# Altium PCB drivers_lvds.PcbDoc (part 2 of 2)
Units mil, origin at the board's own origin, x right, y up, seen from the top; angles counter-clockwise.
Board outline 2600 x 3200 mil, 2 copper layers (Top Layer, Bottom Layer); 42 components, 134 nets, 676 pads, 218 vias.
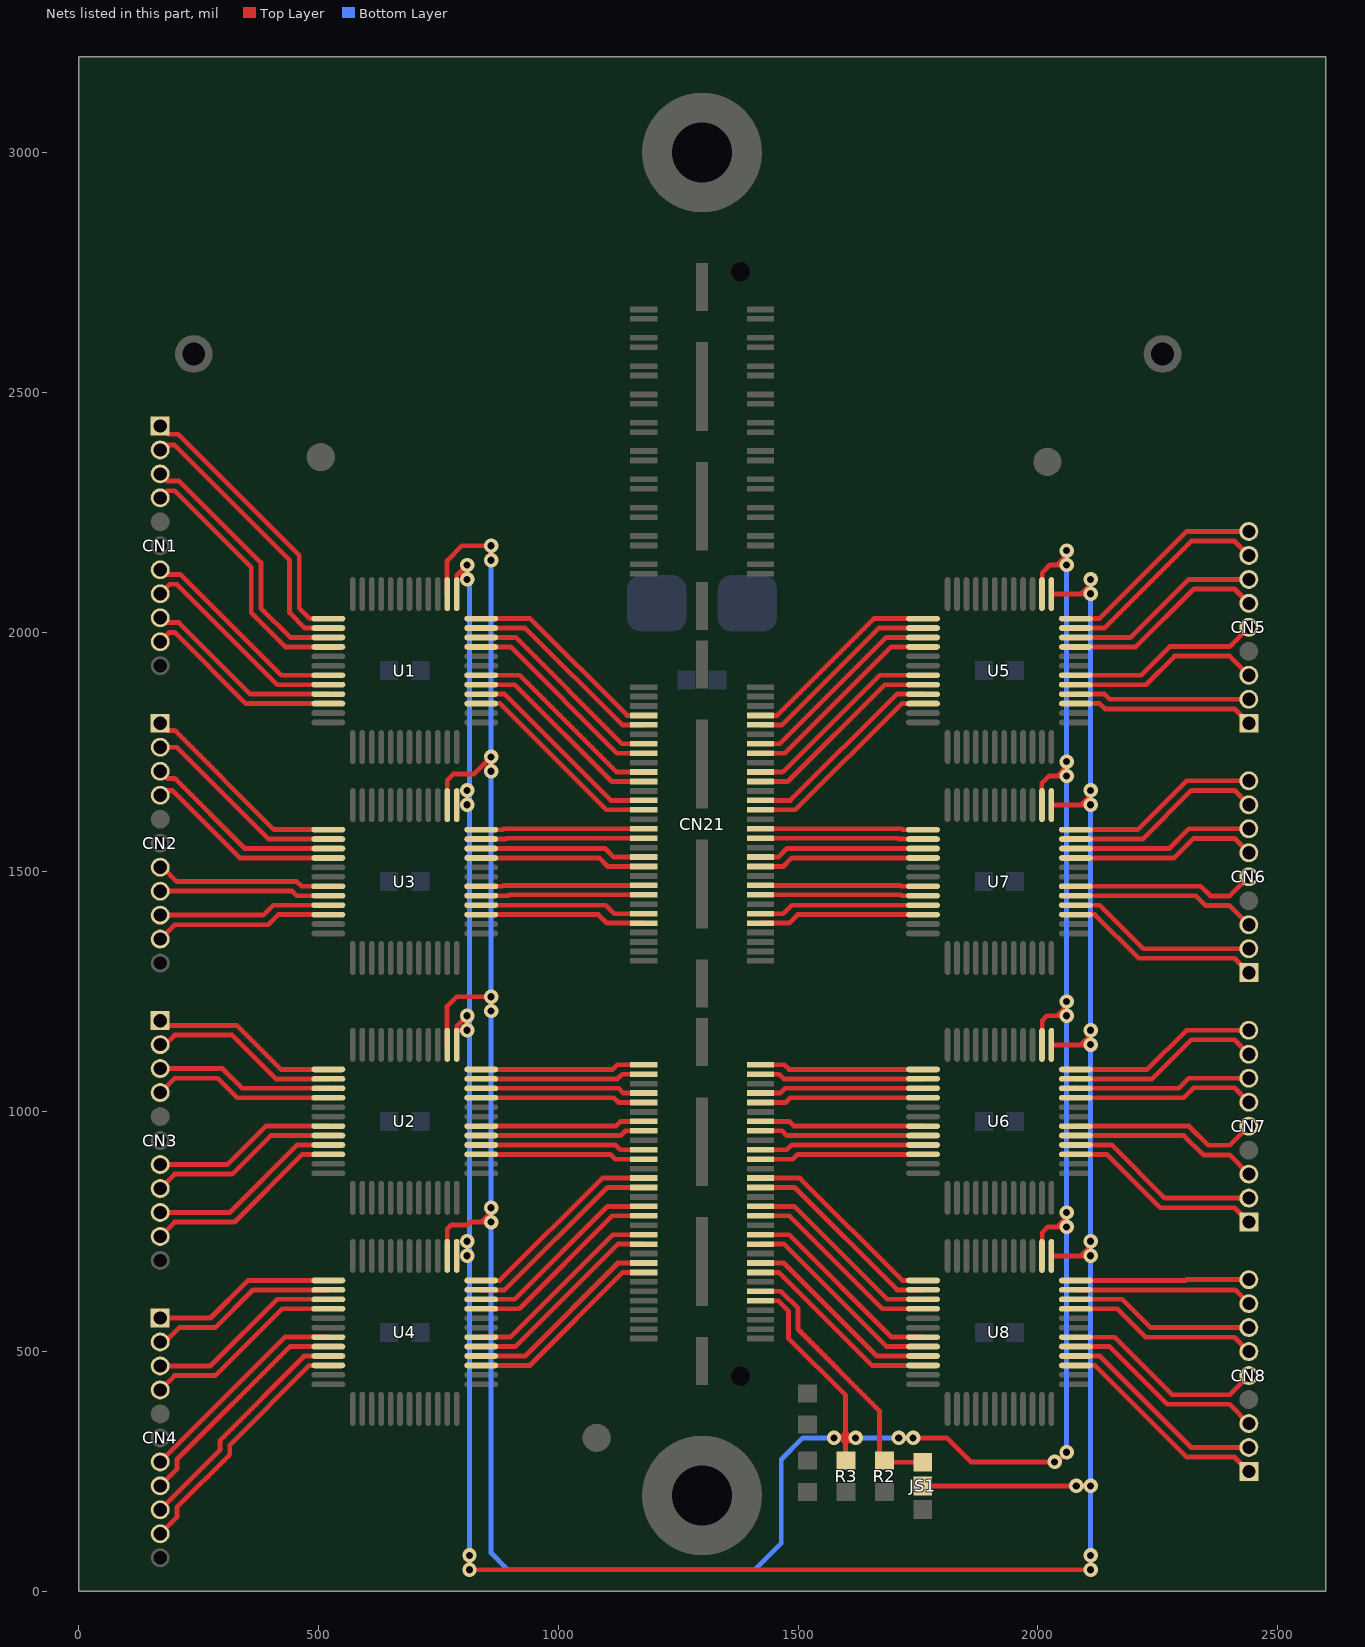
[diagram p2: the nets of this part, all layers, seen from the top]

## Via types
v1: diameter 30, hole 15, Top Layer to Bottom Layer, tented both sides, 218 vias

## Nets (pads, with @x,y where several pads share a name; then routed paths per layer and width w, separated by ;. In a path a pad name is that pad's centre, name@x,y a point inside that pad or via, vN(x,y) a via of type N, cw(c..) or ccw(c..) an arc to the next point about the centre after c; other vN are vias at no path point) (continued)
NetCN21_149: CN21.149 JS1.1 R2.2 | length 566.5
  Top Layer w10: CN21.149@1421.65,625.59 1464.41,625.59 1500,590 1500,546 1670,376 1670,282.48 1683.27,269.21 JS1.1@1760,269.21
PEM0: JS1.2 U1.1 U2.1 U3.1 U4.1 U5.1 U6.1 U7.1 U8.1 | length 6620.1
  Top Layer w10: U2.1@788.27,1139.45 788.27,1178.27 v1(810,1200) v1(810,1170) U2.1@790,1170 ; U1.1@788.27,2079.45 788.27,2118.27 v1(810,2140) v1(810,2110) 795.5,2124.5 795.5,2125.5 ; v1(815,75) v1(815,45) 1220,45 v1(2110,45) v1(2110,75) ; JS1.2@1760,220 v1(2110,220) ; U8.1@2028.27,699.45 2109.45,699.45 v1(2110,700) ; U6.1@2028.27,1139.45 2109.45,1139.45 v1(2110,1140) ; U7.1@2028.27,1639.45 v1@2109.45,1639.45 ; U5.1@2028.27,2079.45 2050,2079.45 2109.45,2079.45 v1(2110,2080) ; 2090,699.45 2110,719.45 v1(2110,730) ; 2090,1139.45 2110,1159.45 v1(2110,1170) ; 2090,1639.45 2110,1659.45 v1(2110,1670) ; 2090,2079.45 2110,2099.45 v1(2110,2110)
  Bottom Layer w10: v1(810,2110) v1(810,2140) ; v1(815,45) 815,215 815,2105 v1@820,2110 ; v1(2080,220) v1(2110,220) ; v1(2110,45) v1(2110,220) ; v1(2110,2110) v1(2110,220)
  other v1: 810,700 810,730 810,1640 2110,1640 810,1670
PEM1: CN21.151 R3.2 U1.2 U2.2 U3.2 U4.2 U5.2 U6.2 U7.2 U8.2 | length 7338.2
  Top Layer w10: U2.2@768.27,1139.45 768.27,1220.27 788,1240 v1(860,1240) v1(860,1210) ; U1.2@768.27,2079.45 768.27,2149.27 799,2180 v1(860,2180) v1(860,2150) ; U4.2@768.58,699.45 768.58,755.58 777,764 811,764 817,770 v1(860,770) ; U3.2@768.58,1639.45 768.58,1691.58 781,1704 824,1704 v1(860,1740) v1(860,1710) ; 840,770 860,790 v1(860,800) ; CN21.151@1421.65,605.91 1459.09,605.91 1480,585 1480,528 1599,409 1599,273.48 R3.2@1600,272.48 ; 1599,320 v1(1620,320) ; v1(1710,320) v1(1740,320) 1810,320 1860,270 2040,270 v1(2060,290) ; U7.2@2008,1663.67 2008,1685 2023,1700 v1(2060,1700) v1@2060,1703 ; U5.2@2009,2103.07 2009,2124 2025,2140 v1(2060,2140) v1@2060,2143 ; U8.2@2009.61,722.46 2009,723.07 2009,748 2021,760 v1(2060,760) ; U6.2@2009.61,1162.46 2009,1163.07 2009,1190 2019,1200 v1(2060,1200) ; 2040,760 2060,780 v1(2060,790) ; 2040,1200 2060,1220 v1(2060,1230) ; 2040,1700 2060,1720 v1(2060,1730) ; 2040,2140 2060,2160 v1(2060,2170) v1@2055,2170 ; v1@1588,320 1599,331 v1@1610,320 ; v1@1588,320 v1(1575,320) v1(1620,320) ; v1@1588,320 1599,309 v1@1610,320 ; v1@1610,320 v1(1620,320)
  Bottom Layer w10: v1(860,2180) 860,80 895,45 1410,45 1465,100 1465,275 1510,320 v1(1575,320) ; v1(1620,320) v1(1740,320) ; v1(2035,270) 2040,270 v1(2060,290) ; v1@2055,290 v1(2060,290) ; v1@2060,1720 v1@2063,1723 ; v1@2060,2143 v1(2060,2140) ; v1(2060,2170) v1(2060,2140) ; v1(2060,290) v1(2060,2140)
RX1_N: CN1.2 U1.14 | length 577.1
  Top Layer w10: CN1.2@170,2380 180,2390 200,2390 440,2150 440,2040 471.42,2008.58 U1.14@520.55,2008.58
RX1_ND: CN21.50 U1.47 | length 422.5
  Top Layer w10: U1.47@839.45,2008.58 931.42,2008.58 1133.31,1806.69 CN21.50@1178.35,1806.69
RX1_P: CN1.1 U1.13 | length 581.4
  Top Layer w10: CN1.1@170,2430 187.5,2412.5 207.5,2412.5 460,2160 460,2050 481.73,2028.27 U1.13@520.55,2028.27
RX1_PD: CN21.48 U1.48 | length 422.5
  Top Layer w10: U1.48@839.45,2028.27 941.73,2028.27 1143.62,1826.38 CN21.48@1178.35,1826.38
RX2_N: CN1.4 U1.16 | length 547.4
  Top Layer w10: CN1.4@170,2280 185,2295 200,2295 360,2135 360,2040 430.79,1969.21 U1.16@520.55,1969.21
RX2_ND: CN21.56 U1.45 | length 430.7
  Top Layer w10: U1.45@839.45,1969.21 900.79,1969.21 1122.36,1747.64 CN21.56@1178.35,1747.64
RX2_P: CN1.3 U1.15 | length 547.5
  Top Layer w10: CN1.3@170,2330 185,2315 210,2315 380,2145 380,2050 441.1,1988.9 U1.15@520.55,1988.9
RX2_PD: CN21.54 U1.46 | length 430.7
  Top Layer w10: U1.46@839.45,1988.9 911.1,1988.9 1132.68,1767.32 CN21.54@1178.35,1767.32
RX3_N: CN1.8 U1.20 | length 445.6
  Top Layer w10: CN1.8@170,2080 190,2100 205,2100 414.53,1890.47 U1.20@520.55,1890.47
RX3_ND: CN21.62 U1.41 | length 422.5
  Top Layer w10: U1.41@839.45,1890.47 909.53,1890.47 1111.42,1688.58 CN21.62@1178.35,1688.58
RX3_P: CN1.7 U1.19 | length 441.6
  Top Layer w10: CN1.7@170,2130 180,2120 213,2120 422.84,1910.16 U1.19@520.55,1910.16
RX3_PD: CN21.60 U1.42 | length 422.5
  Top Layer w10: U1.42@839.45,1910.16 919.84,1910.16 1121.73,1708.27 CN21.60@1178.35,1708.27
RX4_N: CN1.10 U1.22 | length 420.1
  Top Layer w10: CN1.10@170,1980 189.5,1999.5 200.5,1999.5 348.9,1851.1 U1.22@520.55,1851.1
RX4_ND: CN21.68 U1.39 | length 430.7
  Top Layer w10: U1.39@839.45,1851.1 878.9,1851.1 1100.47,1629.53 CN21.68@1178.35,1629.53
RX4_P: CN1.9 U1.21 | length 416.5
  Top Layer w10: CN1.9@170,2030 180,2020 209,2020 358.21,1870.79 U1.21@520.55,1870.79
RX4_PD: CN21.66 U1.40 | length 430.7
  Top Layer w10: U1.40@839.45,1870.79 888.25,1870.79 1109.83,1649.21 CN21.66@1178.35,1649.21
RX5_N: CN2.2 U3.14 | length 429.8
  Top Layer w10: CN2.2@170,1760 205,1760 396.42,1568.58 U3.14@520.55,1568.58
RX5_ND: CN21.74 U3.47 | length 339.7
  Top Layer w10: U3.47@839.45,1568.58 890.58,1568.58 892.47,1570.47 CN21.74@1178.35,1570.47
RX5_P: CN2.1 U3.13 | length 442.4
  Top Layer w10: CN2.1@170,1810 185,1795 200,1795 406.73,1588.27 U3.13@520.55,1588.27
RX5_PD: CN21.72 U3.48 | length 339.9
  Top Layer w10: U3.48@839.45,1588.27 839.72,1588 884,1588 886.16,1590.16 CN21.72@1178.35,1590.16
RX6_N: CN2.4 U3.16 | length 413
  Top Layer w10: CN2.4@170,1660 180,1670 195,1670 335.79,1529.21 U3.16@520.55,1529.21
RX6_ND: CN21.80 U3.45 | length 346.3
  Top Layer w10: U3.45@839.45,1529.21 1085.79,1529.21 1103.58,1511.42 CN21.80@1178.35,1511.42
RX6_P: CN2.3 U3.15 | length 417.3
  Top Layer w10: CN2.3@170,1710 185,1695 200,1695 346.1,1548.9 U3.15@520.55,1548.9
RX6_PD: CN21.78 U3.46 | length 346.3
  Top Layer w10: U3.46@839.45,1548.9 1098.1,1548.9 1115.9,1531.1 CN21.78@1178.35,1531.1
RX7_N: CN2.8 U3.20 | length 354.5
  Top Layer w10: CN2.8@170,1460 445,1460 454.53,1450.47 U3.20@520.55,1450.47
RX7_ND: CN21.86 U3.41 | length 339.7
  Top Layer w10: U3.41@839.45,1450.47 895.47,1450.47 897.36,1452.36 CN21.86@1178.35,1452.36
RX7_P: CN2.7 U3.19 | length 367.1
  Top Layer w10: CN2.7@170,1510 175,1510 205,1480 455,1480 464.84,1470.16 U3.19@520.55,1470.16
RX7_PD: CN21.84 U3.42 | length 339.7
  Top Layer w10: U3.42@839.45,1470.16 884.16,1470.16 886.05,1472.05 CN21.84@1178.35,1472.05
RX8_N: CN2.10 U3.22 | length 371.7
  Top Layer w10: CN2.10@170,1360 200,1390 395,1390 416.1,1411.1 U3.22@520.55,1411.1
RX8_ND: CN21.92 U3.39 | length 346.3
  Top Layer w10: U3.39@839.45,1411.1 1083.9,1411.1 1101.69,1393.31 CN21.92@1178.35,1393.31
RX8_P: CN2.9 U3.21 | length 359.2
  Top Layer w10: CN2.9@170,1410 385,1410 405.79,1430.79 U3.21@520.55,1430.79
RX8_PD: CN21.90 U3.40 | length 346.3
  Top Layer w10: U3.40@839.45,1430.79 1099.21,1430.79 1117.01,1412.99 CN21.90@1178.35,1412.99
RX9_N: CN3.2 U2.14 | length 396.7
  Top Layer w10: CN3.2@170,1140 180,1140 200,1160 320,1160 411.42,1068.58 U2.14@520.55,1068.58
RX9_ND: CN21.104 U2.47 | length 342.9
  Top Layer w10: U2.47@839.45,1068.58 1123.58,1068.58 1133.35,1078.35 CN21.104@1178.35,1078.35
RX9_P: CN3.1 U2.13 | length 392.7
  Top Layer w10: CN3.1@170,1190 180,1180 330,1180 421.73,1088.27 U2.13@520.55,1088.27
RX9_PD: CN21.102 U2.48 | length 342.9
  Top Layer w10: U2.48@839.45,1088.27 1113.27,1088.27 1123.03,1098.03 CN21.102@1178.35,1098.03
RX10_N: CN3.4 U2.16 | length 379.9
  Top Layer w10: CN3.4@170,1040 200,1070 290,1070 330.79,1029.21 U2.16@520.55,1029.21
RX10_ND: CN21.110 U2.45 | length 343
  Top Layer w10: U2.45@839.45,1029.21 1115.79,1029.21 1125.71,1019.29 CN21.110@1178.35,1019.29
RX10_P: CN3.3 U2.15 | length 367.6
  Top Layer w10: CN3.3@170,1090 300,1090 341.1,1048.9 U2.15@520.55,1048.9
RX10_PD: CN21.108 U2.46 | length 343
  Top Layer w10: U2.46@839.45,1048.9 1126.1,1048.9 1136.02,1038.98 CN21.108@1178.35,1038.98
RX11_N: CN3.8 U2.20 | length 396.3
  Top Layer w10: CN3.8@170,840 200,870 320,870 400.47,950.47 U2.20@520.55,950.47
RX11_ND: CN21.116 U2.41 | length 342.9
  Top Layer w10: U2.41@839.45,950.47 1130.47,950.47 1140.24,960.24 CN21.116@1178.35,960.24
RX11_P: CN3.7 U2.19 | length 383.8
  Top Layer w10: CN3.7@170,890 310,890 390.16,970.16 U2.19@520.55,970.16
RX11_PD: CN21.114 U2.42 | length 342.9
  Top Layer w10: U2.42@839.45,970.16 1120.16,970.16 1129.92,979.92 CN21.114@1178.35,979.92
RX12_N: CN3.10 U2.22 | length 421.4
  Top Layer w10: CN3.10@170,740 200,770 325,770 466.1,911.1 U2.22@520.55,911.1
RX12_ND: CN21.122 U2.39 | length 343
  Top Layer w10: U2.39@839.45,911.1 1108.9,911.1 1118.82,901.18 CN21.122@1178.35,901.18
RX12_P: CN3.9 U2.21 | length 408.9
  Top Layer w10: CN3.9@170,790 315,790 455.79,930.79 U2.21@520.55,930.79
RX12_PD: CN21.120 U2.40 | length 343
  Top Layer w10: U2.40@839.45,930.79 1119.21,930.79 1129.13,920.87 CN21.120@1178.35,920.87
RX13_N: CN4.2 U4.14 | length 395.5
  Top Layer w10: CN4.2@170,520 180,520 210,550 285,550 363.58,628.58 U4.14@520.55,628.58
RX13_ND: CN21.128 U4.47 | length 427.4
  Top Layer w10: U4.47@839.45,628.58 888.58,628.58 1102.13,842.13 CN21.128@1178.35,842.13
RX13_P: CN4.1 U4.13 | length 383
  Top Layer w10: CN4.1@170,570 275,570 353.27,648.27 U4.13@520.55,648.27
RX13_PD: CN21.126 U4.48 | length 427.4
  Top Layer w10: U4.48@839.45,648.27 878.27,648.27 1091.81,861.81 CN21.126@1178.35,861.81
RX14_N: CN4.4 U4.16 | length 420.6
  Top Layer w10: CN4.4@170,420 200,450 285,450 424.21,589.21 U4.16@520.55,589.21
RX14_ND: CN21.134 U4.45 | length 419.2
  Top Layer w10: U4.45@839.45,589.21 919.21,589.21 1113.07,783.07 CN21.134@1178.35,783.07
RX14_P: CN4.3 U4.15 | length 408.1
  Top Layer w10: CN4.3@170,470 275,470 413.9,608.9 U4.15@520.55,608.9
RX14_PD: CN21.132 U4.46 | length 419.2
  Top Layer w10: U4.46@839.45,608.9 908.9,608.9 1102.76,802.76 CN21.132@1178.35,802.76
RX15_N: CN4.8 U4.20 | length 482.6
  Top Layer w10: CN4.8@170,220 205,255 205,275 440.47,510.47 U4.20@520.55,510.47
RX15_ND: CN21.140 U4.41 | length 427.4
  Top Layer w10: U4.41@839.45,510.47 910.47,510.47 1124.02,724.02 CN21.140@1178.35,724.02
RX15_P: CN4.7 U4.19 | length 458.3
  Top Layer w10: CN4.7@170,270 430.16,530.16 U4.19@520.55,530.16
RX15_PD: CN21.138 U4.42 | length 427.4
  Top Layer w10: U4.42@839.45,530.16 900.16,530.16 1113.7,743.7 CN21.138@1178.35,743.7
RX16_N: CN4.10 U4.22 | length 519.4
  Top Layer w10: CN4.10@170,120 205,155 205,175 315,285 315,305 481.1,471.1 U4.22@520.55,471.1
RX16_ND: CN21.146 U4.39 | length 419.2
  Top Layer w10: U4.39@839.45,471.1 941.1,471.1 1134.96,664.96 CN21.146@1178.35,664.96
RX16_P: CN4.9 U4.21 | length 495.1
  Top Layer w10: CN4.9@170,170 295,295 295,315 470.79,490.79 U4.21@520.55,490.79
RX16_PD: CN21.144 U4.40 | length 419.2
  Top Layer w10: U4.40@839.45,490.79 930.79,490.79 1124.65,684.65 CN21.144@1178.35,684.65
TX1_N: CN5.8 U5.47 | length 448.1
  Top Layer w10: U5.47@2079.45,2008.58 2138.58,2008.58 2320,2190 2410,2190 CN5.8@2440,2160
TX1_ND: CN21.49 U5.14 | length 422.5
  Top Layer w10: CN21.49@1421.65,1806.69 1466.69,1806.69 1668.58,2008.58 U5.14@1760.55,2008.58
TX1_P: CN5.9 U5.48 | length 435.8
  Top Layer w10: U5.48@2079.45,2028.27 2128.27,2028.27 2310,2210 CN5.9@2440,2210
TX1_PD: CN21.47 U5.13 | length 422.5
  Top Layer w10: CN21.47@1421.65,1826.38 1456.38,1826.38 1658.27,2028.27 U5.13@1760.55,2028.27
TX2_N: CN5.6 U5.45 | length 423
  Top Layer w10: U5.45@2079.45,1969.21 2204.21,1969.21 2325,2090 2410,2090 CN5.6@2440,2060
TX2_ND: CN21.55 U5.16 | length 430.7
  Top Layer w10: CN21.55@1421.65,1747.64 1472.64,1747.64 1694.21,1969.21 U5.16@1760.55,1969.21
TX2_P: CN5.7 U5.46 | length 410.7
  Top Layer w10: U5.46@2079.45,1988.9 2193.9,1988.9 2315,2110 CN5.7@2440,2110
TX2_PD: CN21.53 U5.15 | length 430.7
  Top Layer w10: CN21.53@1421.65,1767.32 1462.32,1767.32 1683.9,1988.9 U5.15@1760.55,1988.9
TX3_N: CN5.3 U5.41 | length 406.8
  Top Layer w10: U5.41@2079.45,1890.47 2225.47,1890.47 2285,1950 2400,1950 CN5.3@2440,1910 CN5.3@2435,1910
TX3_ND: CN21.61 U5.20 | length 422.5
  Top Layer w10: CN21.61@1421.65,1688.58 1478.58,1688.58 1680.47,1890.47 U5.20@1760.55,1890.47
TX3_P: CN5.5 U5.42 | length 401.9
  Top Layer w10: U5.42@2079.45,1910.16 2215.16,1910.16 2275,1970 2400,1970 CN5.5@2440,2010
TX3_PD: CN21.59 U5.19 | length 422.5
  Top Layer w10: CN21.59@1421.65,1708.27 1468.27,1708.27 1670.16,1910.16 U5.19@1760.55,1910.16
TX4_N: CN5.1 U5.39 | length 377.6
  Top Layer w10: U5.39@2079.45,1851.1 2128.9,1851.1 2140,1840 2410,1840 CN5.1@2440,1810
TX4_ND: CN21.67 U5.22 | length 430.7
  Top Layer w10: CN21.67@1421.65,1629.53 1494.53,1629.53 1716.1,1851.1 U5.22@1760.55,1851.1
TX4_P: CN5.2 U5.40 | length 365
  Top Layer w10: U5.40@2079.45,1870.79 2139.21,1870.79 2150,1860 CN5.2@2440,1860
TX4_PD: CN21.65 U5.21 | length 430.7
  Top Layer w10: CN21.65@1421.65,1649.21 1484.21,1649.21 1705.79,1870.79 U5.21@1760.55,1870.79
TX5_N: CN6.8 U7.47 | length 415
  Top Layer w10: U7.47@2079.45,1568.58 2218.58,1568.58 2320,1670 2410,1670 CN6.8@2440,1640
TX5_ND: CN21.73 U7.14 | length 339.7
  Top Layer w10: CN21.73@1421.65,1570.47 1708.53,1570.47 1710.42,1568.58 U7.14@1760.55,1568.58
TX5_P: CN6.9 U7.48 | length 402.7
  Top Layer w10: U7.48@2079.45,1588.27 2208.27,1588.27 2310,1690 CN6.9@2440,1690
TX5_PD: CN21.71 U7.13 | length 339.9
  Top Layer w10: CN21.71@1421.65,1590.16 1715.84,1590.16 1718,1588 1760.28,1588 U7.13@1760.55,1588.27
TX6_N: CN6.6 U7.45 | length 389.9
  Top Layer w10: U7.45@2079.45,1529.21 2284.21,1529.21 2325,1570 2410,1570 CN6.6@2440,1540
TX6_ND: CN21.79 U7.16 | length 346.3
  Top Layer w10: CN21.79@1421.65,1511.42 1469.42,1511.42 1487.21,1529.21 U7.16@1760.55,1529.21
TX6_P: CN6.7 U7.46 | length 377.6
  Top Layer w10: U7.46@2079.45,1548.9 2273.9,1548.9 2315,1590 CN6.7@2440,1590
TX6_PD: CN21.77 U7.15 | length 346.3
  Top Layer w10: CN21.77@1421.65,1531.1 1459.1,1531.1 1476.9,1548.9 U7.15@1760.55,1548.9
TX7_N: CN6.3 U7.41 | length 390.6
  Top Layer w10: U7.41@2079.45,1450.47 2329.53,1450.47 2350,1430 2400,1430 CN6.3@2440,1390 CN6.3@2435,1390
TX7_ND: CN21.85 U7.20 | length 339.7
  Top Layer w10: CN21.85@1421.65,1452.36 1714.64,1452.36 1716.53,1450.47 U7.20@1760.55,1450.47
TX7_P: CN6.5 U7.42 | length 385.5
  Top Layer w10: U7.42@2079.45,1470.16 2339.84,1470.16 2360,1450 2400,1450 CN6.5@2440,1490
TX7_PD: CN21.83 U7.19 | length 339.7
  Top Layer w10: CN21.83@1421.65,1472.05 1712.95,1472.05 1714.84,1470.16 U7.19@1760.55,1470.16
TX8_N: CN6.1 U7.39 | length 410.7
  Top Layer w10: U7.39@2079.45,1411.1 2118.9,1411.1 2210,1320 2410,1320 CN6.1@2440,1290
TX8_ND: CN21.91 U7.22 | length 346.3
  Top Layer w10: CN21.91@1421.65,1393.31 1481.31,1393.31 1499,1411 1760.45,1411 U7.22@1760.55,1411.1
TX8_P: CN6.2 U7.40 | length 398.2
  Top Layer w10: U7.40@2079.45,1430.79 2129.21,1430.79 2220,1340 CN6.2@2440,1340
TX8_PD: CN21.89 U7.21 | length 346.3
  Top Layer w10: CN21.89@1421.65,1412.99 1468.99,1412.99 1486.79,1430.79 U7.21@1760.55,1430.79
TX9_N: CN7.8 U6.47 | length 406.7
  Top Layer w10: U6.47@2079.45,1068.58 2238.58,1068.58 2320,1150 2410,1150 CN7.8@2440,1120
TX9_ND: CN21.103 U6.14 | length 342.9
  Top Layer w10: CN21.103@1421.65,1078.35 1460.65,1078.35 1470.42,1068.58 U6.14@1760.55,1068.58
TX9_P: CN7.9 U6.48 | length 394.4
  Top Layer w10: U6.48@2079.45,1088.27 2228.27,1088.27 2310,1170 CN7.9@2440,1170
TX9_PD: CN21.101 U6.13 | length 342.9
  Top Layer w10: CN21.101@1421.65,1098.03 1471.55,1098.03 1481.32,1088.27 U6.13@1760.55,1088.27
TX10_N: CN7.6 U6.45 | length 381.6
  Top Layer w10: U6.45@2079.45,1029.21 2304.21,1029.21 2325,1050 2410,1050 CN7.6@2440,1020
TX10_ND: CN21.109 U6.16 | length 343
  Top Layer w10: CN21.109@1421.65,1019.29 1474.29,1019.29 1484.21,1029.21 U6.16@1760.55,1029.21
TX10_P: CN7.7 U6.46 | length 369.3
  Top Layer w10: U6.46@2079.45,1048.9 2293.9,1048.9 2315,1070 CN7.7@2440,1070
TX10_PD: CN21.107 U6.15 | length 343
  Top Layer w10: CN21.107@1421.65,1038.98 1462.98,1038.98 1472.9,1048.9 U6.15@1760.55,1048.9
TX11_N: CN7.3 U6.41 | length 398.9
  Top Layer w10: U6.41@2079.45,950.47 2304.53,950.47 2345,910 2400,910 CN7.3@2440,870 CN7.3@2435,870
TX11_ND: CN21.115 U6.20 | length 342.9
  Top Layer w10: CN21.115@1421.65,960.24 1466.76,960.24 1476.53,950.47 U6.20@1760.55,950.47
TX11_P: CN7.5 U6.42 | length 393.8
  Top Layer w10: U6.42@2079.45,970.16 2315.16,970.16 2355.32,930 2400,930 CN7.5@2440,970
TX11_PD: CN21.113 U6.19 | length 342.9
  Top Layer w10: CN21.113@1421.65,979.92 1482.08,979.92 1491.84,970.16 U6.19@1760.55,970.16
TX12_N: CN7.1 U6.39 | length 419
  Top Layer w10: U6.39@2079.45,911.1 2143.9,911.1 2255,800 2410,800 CN7.1@2440,770
TX12_ND: CN21.121 U6.22 | length 343
  Top Layer w10: CN21.121@1421.65,901.18 1489.18,901.18 1499,911 1760.45,911 U6.22@1760.55,911.1
TX12_P: CN7.2 U6.40 | length 406.4
  Top Layer w10: U6.40@2079.45,930.79 2154.21,930.79 2265,820 CN7.2@2440,820
TX12_PD: CN21.119 U6.21 | length 343
  Top Layer w10: CN21.119@1421.65,920.87 1476.87,920.87 1486.79,930.79 U6.21@1760.55,930.79
TX13_N: CN8.8 U8.47 | length 372.4
  Top Layer w10: U8.47@2079.45,628.58 2411.42,628.58 CN8.8@2440,600
TX13_ND: CN21.127 U8.14 | length 427.4
  Top Layer w10: CN21.127@1421.65,842.13 1492.87,842.13 1706.42,628.58 U8.14@1760.55,628.58
TX13_P: CN8.9 U8.48 | length 361.3
  Top Layer w10: U8.48@2079.45,648.27 2308.27,648.27 2310,650 CN8.9@2440,650
TX13_PD: CN21.125 U8.13 | length 427.4
  Top Layer w10: CN21.125@1421.65,861.81 1503.81,861.81 1717.35,648.27 U8.13@1760.55,648.27
TX14_N: CN8.6 U8.45 | length 397.5
  Top Layer w10: U8.45@2079.45,589.21 2165.79,589.21 2225,530 2410,530 CN8.6@2440,500
TX14_ND: CN21.133 U8.16 | length 419.2
  Top Layer w10: CN21.133@1421.65,783.07 1481.93,783.07 1675.79,589.21 U8.16@1760.55,589.21
TX14_P: CN8.7 U8.46 | length 384.9
  Top Layer w10: U8.46@2079.45,608.9 2176.1,608.9 2235,550 CN8.7@2440,550
TX14_PD: CN21.131 U8.15 | length 419.2
  Top Layer w10: CN21.131@1421.65,802.76 1492.24,802.76 1686.1,608.9 U8.15@1760.55,608.9
TX15_N: CN8.3 U8.41 | length 432
  Top Layer w10: U8.41@2079.45,510.47 2149.53,510.47 2270,390 2400,390 CN8.3@2440,350 CN8.3@2435,350
TX15_ND: CN21.139 U8.20 | length 427.4
  Top Layer w10: CN21.139@1421.65,724.02 1470.98,724.02 1684.53,510.47 U8.20@1760.55,510.47
TX15_P: CN8.5 U8.42 | length 426.9
  Top Layer w10: U8.42@2079.45,530.16 2079.61,530 2160,530 2280,410 2400,410 CN8.5@2440,450
TX15_PD: CN21.137 U8.19 | length 427.4
  Top Layer w10: CN21.137@1421.65,743.7 1481.3,743.7 1694.84,530.16 U8.19@1760.55,530.16
TX16_N: CN8.1 U8.39 | length 452.1
  Top Layer w10: U8.39@2079.45,471.1 2118.9,471.1 2310,280 2410,280 CN8.1@2440,250
TX16_ND: CN21.145 U8.22 | length 419.2
  Top Layer w10: CN21.145@1421.65,664.96 1460.04,664.96 1653.9,471.1 U8.22@1760.55,471.1
TX16_P: CN8.2 U8.40 | length 439.6
  Top Layer w10: U8.40@2079.45,490.79 2129.21,490.79 2320,300 CN8.2@2440,300
TX16_PD: CN21.143 U8.21 | length 419.2
  Top Layer w10: CN21.143@1421.65,684.65 1470.35,684.65 1664.21,490.79 U8.21@1760.55,490.79
pads on no net: CN1.5 CN2.5 CN3.5 CN4.5 CN5.4 CN6.4 CN7.4 CN8.4 CN21.1 CN21.2 CN21.3 CN21.4 CN21.5 CN21.6 CN21.7 CN21.8 CN21.9 CN21.10 CN21.11 CN21.12 CN21.13 CN21.14 CN21.15 CN21.16 CN21.17 CN21.18 CN21.19 CN21.20 CN21.21 CN21.22 CN21.23 CN21.24 CN21.25 CN21.26 CN21.27 CN21.28 CN21.29 CN21.30 CN21.31 CN21.32 CN21.33 CN21.34 CN21.35 CN21.36 CN21.37 CN21.38 CN21.39 CN21.40 CN21.41 CN21.42 CN21.43 CN21.44 CN21.46 CN21.52 CN21.58 CN21.64 CN21.70 CN21.76 CN21.82 CN21.88 CN21.94 CN21.95 CN21.96 CN21.97 CN21.98 CN21.100 CN21.106 CN21.112 CN21.118 CN21.124 CN21.130 CN21.136 CN21.142 CN21.148 CN21.150 CN21.154 CN21.155 CN21.156 CN21.157 CN21.158 CN21.MH1 CN21.MH2 U1.6 U1.30 U1.31 U1.35 U1.36 U2.6 U2.30 U2.31 U2.35 U2.36 U3.6 U3.30 U3.31 U3.35 U3.36 U4.6 U4.30 U4.31 U4.35 U4.36 U5.6 U5.30 U5.31 U5.35 U5.36 U6.6 U6.30 U6.31 U6.35 U6.36 U7.6 U7.30 U7.31 U7.35 U7.36 U8.6 U8.30 U8.31 U8.35 U8.36

## Polygon pours and split planes (outlines as drawn)
GND on Bottom Layer "gnd_bottom" (solid, remove dead copper, pour order 1000): 0,0 0,3200 2600,3200 2600,0 0,0
GND on Top Layer "gnd_top" (solid, remove dead copper, pour order 1001): 0,3195 2599.53,3195 2599.53,4.57 10,4.57 0,4.6

## Other copper
Top Layer:
  rectangle net +3V3: 730,2060 748.9,2100
  rectangle net +3V3: 730,1741.1 748.9,1781.1
  rectangle net +3V3: 730,1620 748.9,1660
  rectangle net +3V3: 730,1301.1 748.9,1341.1
  rectangle net +3V3: 730,1120 748.9,1160
  rectangle net +3V3: 730,801.1 748.9,841.1
  rectangle net +3V3: 730,680 748.9,720
  rectangle net +3V3: 730,361.1 748.9,401.1
  rectangle net +3V3: 1970,361.1 1988.9,401.1
  rectangle net +3V3: 1970,680 1988.9,720
  rectangle net +3V3: 1970,801.1 1988.9,841.1
  rectangle net +3V3: 1970,1120 1988.9,1160
  rectangle net +3V3: 1970,1301.1 1988.9,1341.1
  rectangle net +3V3: 1970,1620 1988.9,1660
  rectangle net +3V3: 1970,1741.1 1988.9,1781.1
  rectangle net +3V3: 1970,2060 1988.9,2100
  rectangle net +3V3: 631.57,1741.1 650.47,1781.1
  rectangle net +3V3: 611.89,1741.1 630.79,1781.1
  rectangle net +3V3: 591.1,1620.55 610,1660.55
  rectangle net +3V3: 631.57,1301.1 650.47,1341.1
  rectangle net +3V3: 611.89,1301.1 630.79,1341.1
  rectangle net +3V3: 592.2,1120 611.1,1160
  rectangle net +3V3: 631.57,801.1 650.47,841.1
  rectangle net +3V3: 611.89,801.1 630.79,841.1
  rectangle net +3V3: 592.2,680 611.1,720
  rectangle net +3V3: 631.57,361.1 650.47,401.1
  rectangle net +3V3: 611.89,361.1 630.79,401.1
  rectangle net +3V3: 1832.2,2060 1851.1,2100
  rectangle net +3V3: 1871.1,1740.55 1890,1780.55
  rectangle net +3V3: 1851.89,1741.1 1870.79,1781.1
  rectangle net +3V3: 1831.1,1620.55 1850,1660.55
  rectangle net +3V3: 1871.57,1301.1 1890.47,1341.1
  rectangle net +3V3: 1851.1,1300.55 1870,1340.55
  rectangle net +3V3: 1832.2,1120 1851.1,1160
  rectangle net +3V3: 1871.57,801.1 1890.47,841.1
  rectangle net +3V3: 1851.1,800.55 1870,840.55
  rectangle net +3V3: 1832.2,680 1851.1,720
  rectangle net +3V3: 1871.57,361.1 1890.47,401.1
  rectangle net +3V3: 1851.89,361.1 1870.79,401.1
  rectangle net \PWDN: 540,2060 570,2110
  rectangle net \PWDN: 540,1620 570,1670
  rectangle net \PWDN: 540,1120 570,1170
  rectangle net \PWDN: 540,680 570,730
  rectangle net \PWDN: 1780,2060 1810,2110
  rectangle net \PWDN: 1780,1620 1810,1670
  rectangle net \PWDN: 1780,1120 1810,1170
  rectangle net \PWDN: 1780,680 1810,730
  rectangle net PEM0: 790,1625 821.73,1685
  rectangle net PEM0: 790,685 821.73,745
  region net PEM0: 2034,2090 2044,2080 2034,2070
  region net PEM0: 2034,1649 2044,1639 2034,1629
  region net PEM0: 2034,1150 2044,1140 2034,1130
  region net PEM0: 2034,710 2044,700 2034,690

## Silkscreen, mask and mechanical layers (free items; w line width, h text height)
Top Overlay:
  drawing of 373 lines, arcs and shapes, not listed
  text "DRIVERS_LVDS" at 640,7440 h100
  text "1_00 - Initial revision - jul-22-2016" at 2370,7310 h100
  text "CCB" at 410,7270 h100
  text "1_01 - R1 pull down + R4 pull up + SpW groups silks + test points - nov/2016" at 2355,7158 h100
  text "1_02 - Tx/Rx connectors changed to Axonn cable model - dez/2016" at 2355,6988 h100
  text "1_02" at 450,6930 h100
  text "TOP / BOTTOM: GND PLANE + SIGNALS" at 220,6590 h100
  text "2" at 950,5700 h100
  text "1 oz / 1 oz" at 1340,5540 h100
  text "EXCEPT ON CN21 BORDERS, AS INDICATED IN GERBER" at 2600,4760 h100
  text "DRIVERS_LVDS - 1_02" at 70,3070 h100
  text "DEZ/2016" at 70,2970 h100
  text "IMT - NSEE" at 550,2970 h100
  text "PEM0-GND" at 1810,130 h30
Bottom Overlay:
  drawing of 467 lines, arcs and shapes, not listed
  text "DEZ/2016" at 93,3129 h100 r180
  text "IMT - NSEE" at 568,3129 h100 r180
  text "DRIVERS_LVDS - 1_02" at 83,3029 h100 r180
  text "RX" at 340,2490 h60 r180
  text "SpW A" at 225,2375 h40 r180
  text "TX" at 2220,2340 h60 r180
  text "SpW B" at 2190,2150 h40 r180
  text "SpW B" at 225,2075 h40 r180
  text "SpW A" at 2190,1930 h40 r180
  text "SpW C" at 225,1750 h40 r180
  text "Rx:Cn1(1..4)" at 895,1735 h40 r180
  text "Rx:Cn1(7..10)" at 1335,1735 h40 r180
  text "Tx:Cn5(1..5)" at 875,1665 h40 r180
  text "Tx:Cn5(6..9)" at 1330,1665 h40 r180
  text "SpW D" at 2190,1630 h40 r180
  text "SpW A:" at 920,1595 h40 r180
  text "SpW B:" at 1370,1595 h40 r180
  text "SpW D" at 225,1450 h40 r180
  text "SpW C" at 2190,1410 h40 r180
  text "Rx:Cn2(1..4)" at 872,1408 h40 r180
  text "Rx:Cn2(7..10)" at 1350,1400 h40 r180
  text "Tx:Cn6(6..9)" at 1350,1340 h40 r180
  text "Tx:Cn6(1..5)" at 866,1336 h40 r180
  text "SpW D:" at 1374,1273 h40 r180
  text "SpW C:" at 928,1270 h40 r180
  text "SpW E" at 225,1125 h40 r180
  text "SpW F" at 2190,1110 h40 r180
  text "Rx:Cn3(1..4)" at 852,1108 h40 r180
  text "Rx:Cn3(7..10)" at 1340,1100 h40 r180
  text "Tx:Cn7(6..9)" at 1340,1040 h40 r180
  text "Tx:Cn7(1..5)" at 846,1036 h40 r180
  text "SpW E:" at 919,963 h40 r180
  text "SpW F:" at 1367,961 h40 r180
  text "SpW E" at 2190,890 h40 r180
  text "SpW F" at 225,825 h40 r180
  text "Rx:Cn4(7..10)" at 1340,820 h40 r180
  text "Rx:Cn4(1..4)" at 882,808 h40 r180
  text "Tx:Cn8(6..9)" at 1340,760 h40 r180
  text "Tx:Cn8(1..5)" at 876,736 h40 r180
  text "SpW G:" at 910,672 h40 r180
  text "SpW H:" at 1358,672 h40 r180
  text "SpW H" at 2190,590 h40 r180
  text "SpW G" at 230,510 h40 r180
  text "SpW G" at 2190,370 h40 r180
  text "SpW H" at 230,210 h40 r180
board_outline:
  the board outline again, w10

## Dimensions
0,0 to 2600,0 on Mechanical 13
0,0 to 0,3200 on Mechanical 13

## Text inside footprints (layer, text, board x,y; h text height)
C5: Bottom Overlay "+" at 1564,2043 h39.37
CN21: conector_hsmc "J1" at 1282.01,1617.56 h30 r270
fab1: Top Overlay "WITH EXPLICIT AUTHOR / RESPONSIBLE AUTHORIZATION" at 2404,3428 h100; Top Overlay "- GERBER MODIFICATIONS ARE ONLY ALLOWED" at 2343,3547 h100; Top Overlay "- ELECTRICAL TESTS ARE MANDATORY" at 2347,3745 h100; Top Overlay "- DIMENSIONAL TOLERANCE: +/- 0.2 mm" at 2354,3943 h100; Top Overlay "7. ADDITIONAL NOTES:" at 2289,4138 h100; Top Overlay "- IPC-6011 CLASS 2 / IPC-6012 CLASS 2 / IPC-A-600 CLASS 2" at 2354,4420 h100; Top Overlay "6. SPECIFIED STANDARDS:" at 2286,4592 h100; Top Overlay "- COVER VIAS WITH SOLDER MASK ON BOTH SIDES" at 2358,4878 h100; Top Overlay "- IONIC CONTAMINATION AFTER SOLDERING: 14 ug NaCl / in2 MAX." at 2358,5050 h100; Top Overlay "- GREEN EPOXY THERMAL CURE OR PHOTO IMAGEABLE" at 2358,5237 h100; Top Overlay "- BOTH SIDES" at 2362,5412 h100; Top Overlay "5. SOLDER MASK:" at 2282,5584 h100; Top Overlay "- WHITE (THERMAL CURE EPOXY)" at 2363,5824 h100; Top Overlay "4. SILKSCREEN MASK:" at 2282,6013 h100; Top Overlay "- HOT AIR SOLDER LEVELING (HASL) - SnPb" at 67,3475 h100; Top Overlay "3. FINISHING:" at -40,3648 h100; Top Overlay "- Cu THICKNESS ON HOLE: 20 um + SnPb MIN." at 71,3915 h100; Top Overlay "- DISPLACEMENT: 0.1 mm MAX." at 69,4076 h100; Top Overlay "- NON PLATED HOLE TOLERANCE: +/- 0.1 mm" at 64,4251 h100; Top Overlay "- PLATED HOLE TOLERANCE: +/- 0.1 mm" at 64,4421 h100; Top Overlay "2. HOLE CHARACTERISTICS:" at -40,4598 h100; Top Overlay "- TD MIN.: 310 ºC" at 41,4883 h100; Top Overlay "- TG MIN.: 150 ºC" at 41,5065 h100; Top Overlay "- RAW MATERIAL: FR-4" at 31,5263 h100; Top Overlay "- Cu THICKNESS (FINISHED):" at 43,5543 h100; Top Overlay "- LAYER NUMBERS:" at 40,5702 h100; Top Overlay "- TOTAL THICKNESS: 1.6 mm +/- 0.2 mm" at 36,5857 h100; Top Overlay "1. LAMINATE SPECIFICATIONS:" at -56,6029 h100; Top Overlay "GENERAL NOTES:" at -50,6232 h100; Top Overlay "LAYER STACKUP:" at -42,6749 h100; Top Overlay "REVISIONS DESCRIPTION:" at 2237,7446 h100; Top Overlay "REVISION:" at -46,6924 h100; Top Overlay "CODE NUMBER:" at -50,7100 h100; Top Overlay "AUTHOR:" at -54,7275 h100; Top Overlay "BOARD TITLE:" at -50,7446 h100